# Altium PCB 20210316_finger_texter.PcbDoc
Units mil, origin at the board's own origin, x right, y up, seen from the top; angles counter-clockwise.
Board outline 1968.43 x 2047.1 mil, 2 copper layers (Top Layer, Bottom Layer), stack 55.118 mil thick; 31 components, 24 nets, 160 pads, 105 vias.
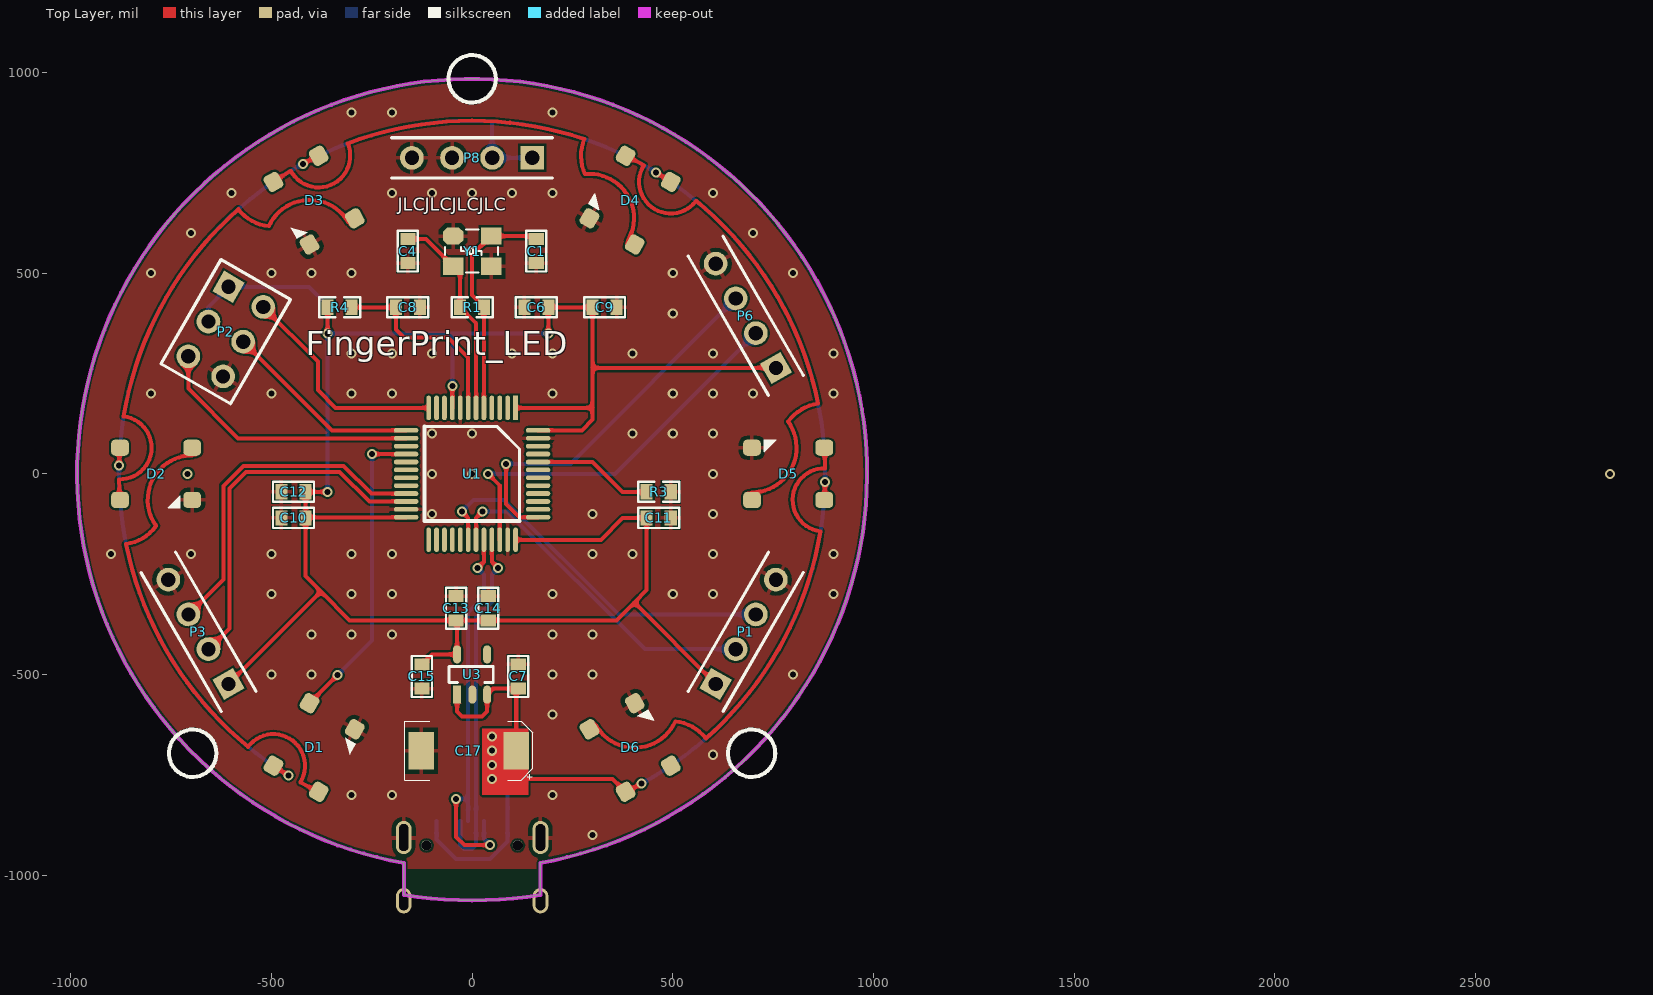
[diagram p0: Top Layer view]
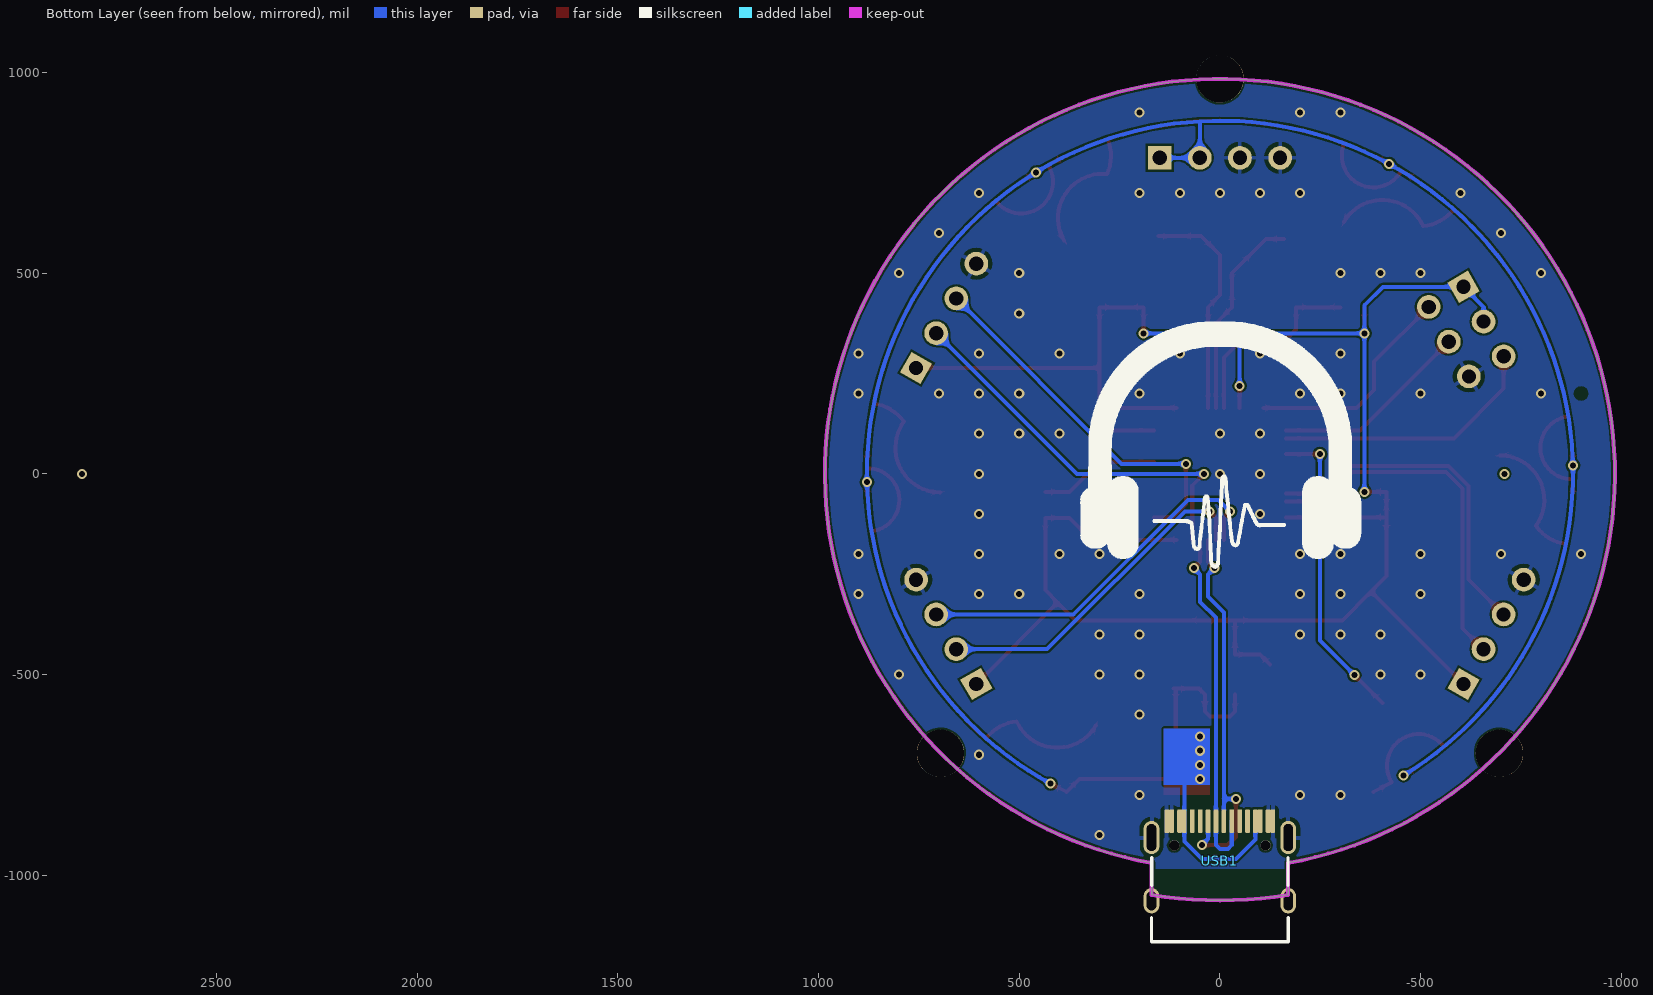
[diagram p1: Bottom Layer view, seen from below]

## Layer stack, top to bottom
Top Solder: solder mask 3.937, Solder Resist, Dk 3.5
Top Layer: signal copper 3.937
Dielectric 1: dielectric 47.2441, FR-4, Dk 4.8
Bottom Layer: signal copper 3.937
Bottom Solder: solder mask 3.937, Solder Resist, Dk 3.5

## Board outline
-170.22,-1049.28 ccw(c0,0) 170.16,-1049.28 170.28,-1049.28 170.28,-969.48 169.91,-969.48 ccw(c0,0) -169.91,-969.48 -170.22,-969.48

## Design rules (kind name [scope] priority, off if disabled: settings)
Clearance [All] p1: gap=5
PolygonConnect PolygonConnect_1 [IsVia] p1: connectstyle=Direct reliefconductorwidth=10 reliefentries=4 polygonreliefangle="90 Angle" airgapwidth=10
PolygonConnect [All] p2: connectstyle=Relief reliefconductorwidth=10 reliefentries=4 polygonreliefangle="90 Angle" airgapwidth=10
RoutingVias [All] p1: holewidth=28 width=50 viastyle="Through Hole" minholewidth=28 minwidth=50 maxholewidth=28 maxwidth=50
SolderMaskExpansion [All] p1: expansion=4
Width [All] p1: maxlimit=100 minlimit=5 preferedwidth=10 minimp=50.000000 maximp=50.000000 favimp=50.000000
30 further rules are at their usual default settings.

## Components (designator, comment, footprint, x,y, rotation, side; value= is the part's Value field where it differs from the comment)
C1 "20pF" C0603 160,585 r270 top
C4 "20pF" C0603 -160,585 r270 top
C6 "104" C0603 190,415 r180 top
C7 "4.7uF" C0603 115,-535 r90 top
C8 "104" C0603 -130,415 r180 top
C9 "104" C0603 300,415 r0 top
C10 "104" C0603 -415,-110 r180 top
C11 "104" C0603 435,-110 r0 top
C12 "104" C0603 -415,-45 r180 top
C13 "104" C0603 -40,-365 r90 top
C14 "4.7uF" C0603 40,-365 r90 top
C15 "4.7uF" C0603 -125,-475 r270 top
C17 "47uF" 6032-C/P 110,-690 r180 top
D1 "RGB" LED_5050_WS2812B -393.7,-681.91 r60 top locked
D2 "RGB" LED_5050_WS2812B -787.4,0 r0 top locked
D3 "RGB" LED_5050_WS2812B -393.7,681.91 r300 top locked
D4 "RGB" LED_5050_WS2812B 393.7,681.91 r240 top locked
D5 "RGB" LED_5050_WS2812B 787.4,0 r180 top locked
D6 "RGB" LED_5050_WS2812B 393.7,-681.91 r120 top locked
P1 "Header 4" HDR1X4 681.91,-393.71 r60 top locked
P2 "Header 3X2" HDR2X3 -613.72,354.33 r240 top
P3 "Header 4" HDR1X4 -681.9,-393.7 r120 top locked
P6 "Header 4" HDR1X4 681.91,393.69 r120 top locked
P8 "Header 4" HDR1X4 0,787.4 r180 top locked
R1 "1M" R0603 -30,415 r0 top
R3 "10K" R0603 495,-45 r180 top
R4 "10K" R0603 -300,415 r180 top
U1 "STM32F103C8T6" FQFP-S0.5--G48/N 0,0 r270 top locked
U3 "SPX3819.3.3" SOT23-5 0,-500 r90 top
USB1 "Type-C" Type-C-TOP 0,-964.57 r270 bottom locked
Y1 "8M" SMD3225 0,555 r180 top

## Footprints (in the part's own frame and the unit in brackets; to place one, negate y for a bottom-side part, rotate by r counter-clockwise, add the part's x,y. Pads: shape width x height; smd on the part's side, far side on the other; paste and mask are expansions set on the pad)
6032-C/P [mm]
  rect 1.6x2.4 smd: 1(0,0) 2(6.02,0)
  silkscreen extent -1.04,-1.85 7.06,1.85
C0603 [mil]
  rect 30x38 smd: 1(0,0) 2(60,0)
  silkscreen extent -21,-25 81,25, body extent -3,-18 63,18, height 35
FQFP-S0.5--G48/N [mm]
  rect 1.55x0.3 smd: 1(-4.175,2.75)
  oval 1.55x0.3 smd: 2(-4.175,2.25) 3(-4.175,1.75) 4(-4.175,1.25) 5(-4.175,0.75) 6(-4.175,0.25) 7(-4.175,-0.25) 8(-4.175,-0.75) 9(-4.175,-1.25) 10(-4.175,-1.75) 11(-4.175,-2.25) 12(-4.175,-2.75) 25(4.175,-2.75) 26(4.175,-2.25) 27(4.175,-1.75) 28(4.175,-1.25) 29(4.175,-0.75) 30(4.175,-0.25) 31(4.175,0.25) 32(4.175,0.75) 33(4.175,1.25) 34(4.175,1.75) 35(4.175,2.25) 36(4.175,2.75)
  oval 0.3x1.55 smd: 13(-2.75,-4.175) 14(-2.25,-4.175) 15(-1.75,-4.175) 16(-1.25,-4.175) 17(-0.75,-4.175) 18(-0.25,-4.175) 19(0.25,-4.175) 20(0.75,-4.175) 21(1.25,-4.175) 22(1.75,-4.175) 23(2.25,-4.175) 24(2.75,-4.175) 37(2.75,4.175) 38(2.25,4.175) 39(1.75,4.175) 40(1.25,4.175) 41(0.75,4.175) 42(0.25,4.175) 43(-0.25,4.175) 44(-0.75,4.175) 45(-1.25,4.175) 46(-1.75,4.175) 47(-2.25,4.175) 48(-2.75,4.175)
  silkscreen extent -3,-3 3,3, body extent -4.5,-4.44 4.5,4.56, height 1.56
HDR1X4 [mm] "Connector; Header; 4 Position"
  rect 1.5x1.5 hole 0.9: 1(-3.81,0)
  round 1.5 hole 0.9: 2(-1.27,0) 3(1.27,0) 4(3.81,0)
  silkscreen extent -5.08,-1.27 5.08,1.27
HDR2X3 [mm] "Connector; Header; 3x2 Position"
  rect 1.5x1.5 hole 0.9: 1(-2.54,-1.27)
  round 1.5 hole 0.9: 2(-2.54,1.27) 3(0,-1.27) 4(0,1.27) 5(2.54,-1.27) 6(2.54,1.27)
  silkscreen extent -3.81,-2.54 3.81,2.54
LED_5050_WS2812B [mil]
  rrect50% 44x40 smd: 1(-90,65) 2(-90,-65) 3(90,-65) 4(90,65)
  silkscreen extent 30,-85 60,-55, body extent -106,-98 106,98, height 69
R0603 [mil]
  rect 30x38 smd: 1(0,0) 2(60,0)
  silkscreen extent -21,-25 81,25, body extent -4,-19 64,19, height 22
SMD3225 [mm]
  rect 1.3x1.1 smd: 1(1.2,0.95) 2(-1.2,0.95) 3(-1.2,-0.95)
  oct 1.3x1.1 smd: 4(1.2,-0.95)
  silkscreen extent -1.65,-1.35 1.7,1.35, body extent -1.55,-1.25 1.65,1.25, height 0.91
SOT23-5 [mil]
  rect 45x20 smd: 1(-50,37.5)
  oval 45x20 smd: 2(-50,-0.5) 3(-50,-37.5) 4(50,-37.5) 5(50,37.5)
  silkscreen extent -20,-52 20,58, body extent -58,-58 52,56, height 47
Type-C-TOP [mm]
  round 0.65 hole 0.65: 0(-0.98,-2.89) 0(-0.98,2.89)
  oval 1.6x1 hole 0.6 slot 1.2 at 0 deg: 1(2.52,4.325) 2(2.52,-4.325)
  oval 2.1x1 hole 0.6 slot 1.7 at 0 deg: 3(-1.48,-4.325) 4(-1.48,4.325)
  rrect50% 1.5x0.3 smd: A1(-2.52,-3.35) A4(-2.52,-2.55) A5(-2.52,-1.25) A6(-2.52,-0.25) A7(-2.52,0.25) A8(-2.52,1.25) A9(-2.52,2.55) A12(-2.52,3.35) B1(-2.52,3.05) B4(-2.52,2.25) B5(-2.52,1.75) B6(-2.52,0.75) B7(-2.52,-0.75) B8(-2.52,-1.75) B9(-2.52,-2.25) B12(-2.52,-3.05)
  silkscreen extent -0.22,-4.33 5.12,4.33, body extent -2.57,-4.48 5.18,4.47, height 3.26

## Part data
C1 C4: library part CAP, "Capacitor"
C6 C8 C9 C10 C11 C12 C13: library part Cap, "电容"
C7 C14 C15: library part Cap, "Capacitor"
C17: library part "Cap Pol1", "Polarized Capacitor (Radial)"
D1 D2 D3 D4 D5 D6: library part LED_5050_WS2812B, "LED"
P1 P3 P6 P8: "Header, 4-Pin"
P2: "Header, 3-Pin, Dual row"
R1 R3 R4: library part Res, "电阻"
U1: library part STM32F103xx
U3: "LDO"
USB1: library part USB-Type-C-TOP
Y1: library part 3225

## Free pads (board coordinates)
  round 118.11 hole 118.11: 0(-696.29,-696.29) 0(0,984.25) 0(696.29,-696.29)

## Via types
v1: diameter 25, hole 15, Top Layer to Bottom Layer, tented both sides, 105 vias

## Nets (pads, with @x,y where several pads share a name; then routed paths per layer and width w, separated by ;. In a path a pad name is that pad's centre, name@x,y a point inside that pad or via, vN(x,y) a via of type N, cw(c..) or ccw(c..) an arc to the next point about the centre after c; other vN are vias at no path point)
CPU_RST#: C8.2 R4.1 U1.7 | length 499.7
  Top Layer w10: R4.1 C8.2 -190,360 -170,340 -60,340 -9.84,289.84 U1.7
GND: C1.2 C4.2 C6.2 C7.2 C8.1 C9.2 C10.2 C11.2 C12.2 C13.2 C14.2 C15.2 C17.2 D1.3 D2.3 D3.3 D4.3 D5.3 D6.3 P1.4 P2.6 P3.4 P6.4 P8.3 P8.4 R3.1 U1.8 U1.23 U1.35 U1.47 U3.2 USB1.1 USB1.2 USB1.3 USB1.4 USB1.A1 USB1.A12 USB1.B1 USB1.B12 Y1.2 Y1.4
  other v1: 300,-900 -300,-800 -200,-800 200,-800 600,-700 200,-600 -500,-500 -400,-500 200,-500 300,-500 800,-500 -400,-400 -300,-400 -200,-400 200,-400 300,-400 -500,-300 -300,-300 -200,-300 200,-300 500,-300 600,-300 900,-300 -900,-200 -700,-200 -500,-200 -300,-200 -200,-200 300,-200 400,-200 600,-200 900,-200 -100,-100 300,-100 600,-100 -100,0 0,0 600,0 -100,100 0,100 400,100 500,100 600,100 -800,200 -500,200 -300,200 -200,200 200,200 500,200 600,200 700,200 900,200 -300,300 -200,300 -100,300 100,300 200,300 400,300 600,300 900,300 500,400 -800,500 -500,500 -400,500 -300,500 500,500 800,500 -700,600 700,600 -600,700 -200,700 -100,700 0,700 100,700 200,700 600,700 -300,900 -200,900 200,900
NetC1_1: C1.1 R1.2 U1.5 Y1.3 | length 564.9
  Top Layer w10: U1.5 R1.2@29.53,414.53 ; R1.2 0,445 0,545.16 Y1.3 C1.1@152.6,592.4
NetC4_1: C4.1 R1.1 U1.6 Y1.1 | length 517.5
  Top Layer w10: C4.1 -114.65,585 Y1.1 -30,500.35 R1.1 9.84,375.16 U1.6
NetD1_2: D1.2 D2.4 | length 2452.9
  Top Layer w10: -862.2,-175.1 ccw(c0,0) -558,-680.22 cw(c0,0) -862.2,-175.1 ; -862.22,-174.98 ccw(c-877.4,-65) -787.37,-129.96 cw(c-877.4,-65) -862.22,-174.98 ; -787.48,-129.87 cw(c-697.4,-65) -697.4,46.01 ccw(c-697.4,-65) -787.48,-129.87 ; -558.04,-680.18 cw(c-494.99,-727.35) -427.98,-768.7 ccw(c-494.99,-727.35) -558.04,-680.18 ; -428.03,-768.67 ccw(c0,0) D1.2 cw(c0,0) -428.03,-768.67
NetD2_2: D2.2 D3.4 | length 1226.4
  Top Layer w10: -879.7,-13.71 ccw(c-877.4,65) -868.07,143.19 ; -879.69,-13.65 ccw(c0,0) D2.2 ; -868.08,143.13 cw(c0,0) -582.73,659.14 ; -582.64,659.21 ccw(c-494.99,727.35) -506.22,616.9 ; -506.21,617.04 cw(c-404.99,571.47) D3.4@-308.85,626.97
NetD3_2: D3.2 D4.4 | length 1226.4
  Top Layer w10: D3.2@-494.98,727.35 cw(c0,0) -451.66,755.01 ; -451.71,754.99 ccw(c-382.4,792.35) -310.03,823.37 ; -310.08,823.34 cw(c0,0) 279.47,834.23 ; 279.58,834.19 ccw(c382.42,792.35) 281.14,746.85 ; 281.28,746.91 cw(c292.42,636.46) D4.4@388.56,580.96
NetD4_2: D4.2 D5.4 | length 1226.4
  Top Layer w10: D4.2@382.42,792.34 cw(c0,0) 428.03,768.66 ; 427.99,768.69 ccw(c495,727.34) 558.05,680.17 ; 558,680.21 cw(c0,0) 862.21,175.09 ; D5.4@697.41,-46.02 ccw(c697.41,64.99) 787.49,129.86 ; 787.37,129.95 cw(c877.41,64.99) 862.22,174.97
NetD5_2: D5.2 D6.4 | length 1226.4
  Top Layer w10: D6.4@308.86,-626.98 ccw(c404.99,-571.48) 506.22,-617.05 ; 506.23,-616.91 cw(c494.99,-727.36) 582.65,-659.22 ; 582.74,-659.15 ccw(c0,0) 868.09,-143.14 ; 868.08,-143.2 cw(c877.4,-65.01) 879.7,13.7 ; D5.2 cw(c0,0) 879.7,13.64
NetR3_2: R3.2 U1.44 | length 301.5
  Top Layer w10: U1.44 300.47,29.53 375,-45 R3.2
RGB_LED: D1.4 U1.16 | length 770
  Top Layer w10: D1.4 v1(-335,-501.47) ; v1(-249.21,49.21) U1.16
  Bottom Layer w10: v1(-335,-501.47) -249.21,-415.69 v1(-249.21,49.21)
SWCLK: P6.3 U1.37 | length 935.7
  Top Layer w10: v1(85,25) 85,-75 118.27,-108.27 U1.37
  Bottom Layer w10: v1(85,25) 244.92,25 P6.3
SWDIO: P6.2 U1.34 | length 988.4
  Top Layer w10: v1(40,0) 68.9,-28.9 U1.34
  Bottom Layer w10: v1(40,0) 356.52,0 P6.2
TOUCH: P2.5 U1.14 | length 674.5
  Top Layer w10: P2.5 -707.02,212.02 -583.58,88.58 U1.14
USART1_RX: P1.2 U1.31 | length 850.6
  Top Layer w10: U1.31 9.84,-109.53 v1(25.63,-93.74)
  Bottom Layer w10: v1(25.63,-93.74) 87.53,-93.74 430.79,-437.01 P1.2
USART1_TX: P1.3 U1.30 | length 939.8
  Top Layer w10: v1(-25.63,-93.74) -9.84,-109.53 U1.30
  Bottom Layer w10: v1(-25.63,-93.74) 3.11,-65 80,-65 365.4,-350.4 P1.3
USART2_RX: P2.4 U1.13 | length 497.6
  Top Layer w10: P2.4 -349.36,108.27 U1.13
USART2_TX: P2.2 U1.12 | length 558
  Top Layer w10: P2.2 -384.27,279.79 -384.27,208.64 -340,164.37 U1.12
USART3_RX: P3.2 U1.22 | length 910.6
  Top Layer w10: P3.2 -605,-385.1 -605,-36.21 -563.79,5 -330,5 -256.1,-68.9 U1.22
USART3_TX: P3.3 U1.21 | length 861.4
  Top Layer w10: P3.3 -620,-263.5 -620,-30 -570,20 -320,20 -250.79,-49.21 U1.21
USB-PWR-DM: U1.32 USB1.A7 USB1.B7 | length 1014.6
  Top Layer w10: v1(-40,-810) -40,-904.53 -19.53,-925 v1(45,-925) ; v1(13.74,-235) 29.53,-219.21 U1.32
  Bottom Layer w10: v1(-40,-810) -9.84,-810 ; USB1.A7 -9.84,-810 ; v1(13.74,-235) 29.53,-250.79 29.53,-305.63 -9.84,-345 -9.84,-810 ; USB1.B7 29.53,-909.53 v1(45,-925)
USB-PWR-DP: U1.33 USB1.A6 USB1.B6 | length 897.7
  Top Layer w10: U1.33 49.21,-219.21 v1(65,-235)
  Bottom Layer w10: USB1.B6 -29.53,-925.47 -20,-935 0,-935 9.84,-925.16 USB1.A6 9.84,-358.58 49.21,-319.21 49.21,-250.79 v1(65,-235)
VCC_3V3: C6.1 C9.1 C10.1 C11.1 C12.1 C13.1 C14.1 C15.1 P1.1 P2.1 P2.3 P3.1 P6.1 R4.2 U1.1 U1.9 U1.24 U1.36 U1.48 U3.5 | length 5675.1
  Top Layer w10: P3.1 -376.65,-293.35 ; C10.1@-413.27,-108.27 U1.24 ; v1(-360,-45) C12.1 C10.1 -415,-255 -376.65,-293.35 ; v1(-360,350) R4.2 ; C15.1 -100,-450 U3.5 C13.1@-37.5,-367.5 ; U1.9 v1(-49.21,219.21) ; U1.36 320.63,-164.37 375,-110 C11.1 435,-290 404.15,-320.85 ; U1.1 300,164.37 ; U1.48 273.27,108.27 300,135 300,164.37 ; v1(190,350) C6.1 C9.1 300,263.79 ; P1.1@583.61,-523.61 P1.1 404.15,-320.85 ; P6.1 300,263.79 ; -376.65,-293.35 -305,-365 C13.1 C14.1 360,-365 404.15,-320.85 ; 300,164.37 300,263.79
  Bottom Layer w10: P2.3 -657.02,415.93 P2.1 -405.93,465.93 -360,420 v1(-360,350) ; v1(-360,-45) -360,263.79 v1(-360,350) ; v1(-49.21,219.21) -49.21,350 ; v1(190,350) -49.21,350 ; v1(-360,350) -49.21,350
VCC_5V: C7.1 C17.1 D1.1 D2.1 D3.1 D4.1 D5.1 D6.1 P8.1 P8.2 U3.1 U3.3 USB1.A4 USB1.A9 USB1.B4 USB1.B9 | length 6272.3
  Top Layer w10: v1(-879.55,20.77) cw(c0,0) D2.1 ; v1(-421.78,772.1) cw(c0,0) D3.1@-382.4,792.35 ; U3.1 -37.5,-592.5 -25,-605 25,-605 37.5,-592.5 U3.3 52.5,-535 C7.1 ; v1(50,-760) 350.06,-760 D6.1 ccw(c0,0) v1(421.79,-772.11) ; C17.1 C7.1@110,-540 ; v1(457.77,751.33) cw(c0,0) D4.1@495,727.34 ; D5.1 ccw(c0,0) v1(879.56,-20.78) ; D1.1 ccw(c0,0) v1(-457.77,-751.34) cw(c0,0) D1.1
  Bottom Layer w10: v1(-457.77,-751.34) cw(c0,0) 50,878.38 ; USB1.B4 -88.58,-911.42 -40,-960 45,-960 88.58,-916.42 USB1.B9 88.58,-763 ; P8.1 P8.2 50,878.38 ; v1(421.79,-772.11) ccw(c0,0) 50,878.38
  other v1: 50,-725 50,-690 50,-655
pads on no net: D6.2 U1.2 U1.3 U1.4 U1.10 U1.11 U1.15 U1.17 U1.18 U1.19 U1.20 U1.25 U1.26 U1.27 U1.28 U1.29 U1.38 U1.39 U1.40 U1.41 U1.42 U1.43 U1.45 U1.46 U3.4 USB1.0 USB1.A5 USB1.A8 USB1.B5 USB1.B8
copper on no net:
  other v1: -708.66,0 2835,0

## Polygon pours and split planes (outlines as drawn)
GND on Top Layer "Top Layer" (solid, remove dead copper, pour order 4): 984.26,-984.26 -984.23,-984.26 -984.24,-984.27 -984.24,984.23 -984.25,984.24 984.25,984.24 984.26,984.25
GND on Bottom Layer "Top Layer" (solid, remove dead copper, pour order 3): 984.26,-984.25 -984.24,-984.25 -984.25,-984.26 -984.25,984.24 984.24,984.24 984.25,984.25

## Keep-outs
Keep-Out Layer:
  lines w10: -170.22,-969.48 -170.22,-1049.28 ccw(c0,0) 170.16,-1049.28 ; -169.91,-969.48 cw(c0,0) 169.91,-969.48 ; 170.28,-1049.28 170.28,-969.48

## Other copper
Top Layer:
  rectangle net VCC_5V: 25,-800 140,-635
Bottom Layer:
  rectangle net VCC_5V: 25,-775 140,-635

## Silkscreen, mask and mechanical layers (free items; w line width, h text height)
Top Overlay:
  circle w10: c0,984.25 r59.06
  circle w10: c696.29,-696.29 r59.06
  circle w10: c-696.29,-696.29 r59.06
  text "JLCJLCJLCJLC" at -185,655 h31.5
  text "FingerPrint_LED" at -415,295 h60
Bottom Overlay:
  drawing of 2076 lines, arcs and shapes, not listed